# Altium PCB pcb.PcbDoc
Units mm, origin at the board's own origin, x right, y up, seen from the top; angles counter-clockwise.
Board outline 60 x 40 mm, 2 copper layers (Top Layer, Bottom Layer); 12 components, 13 nets, 57 pads, 0 vias.
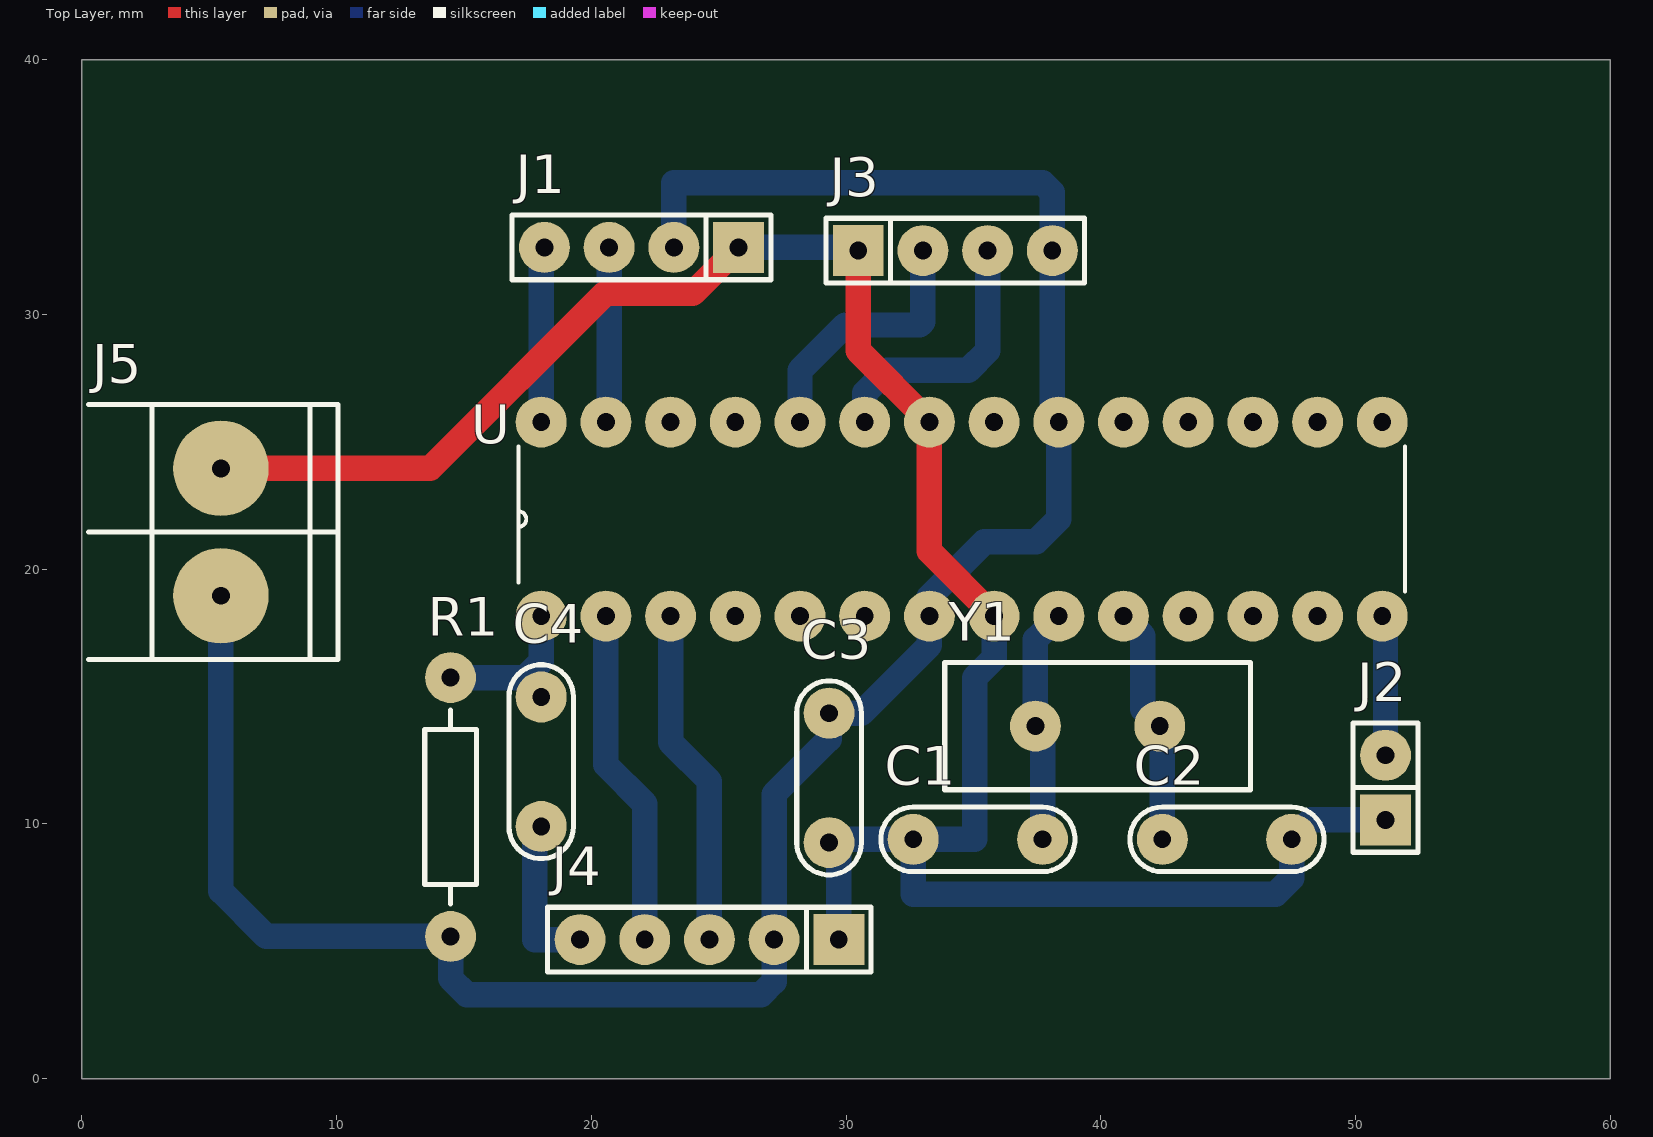
[diagram p0: Top Layer view]
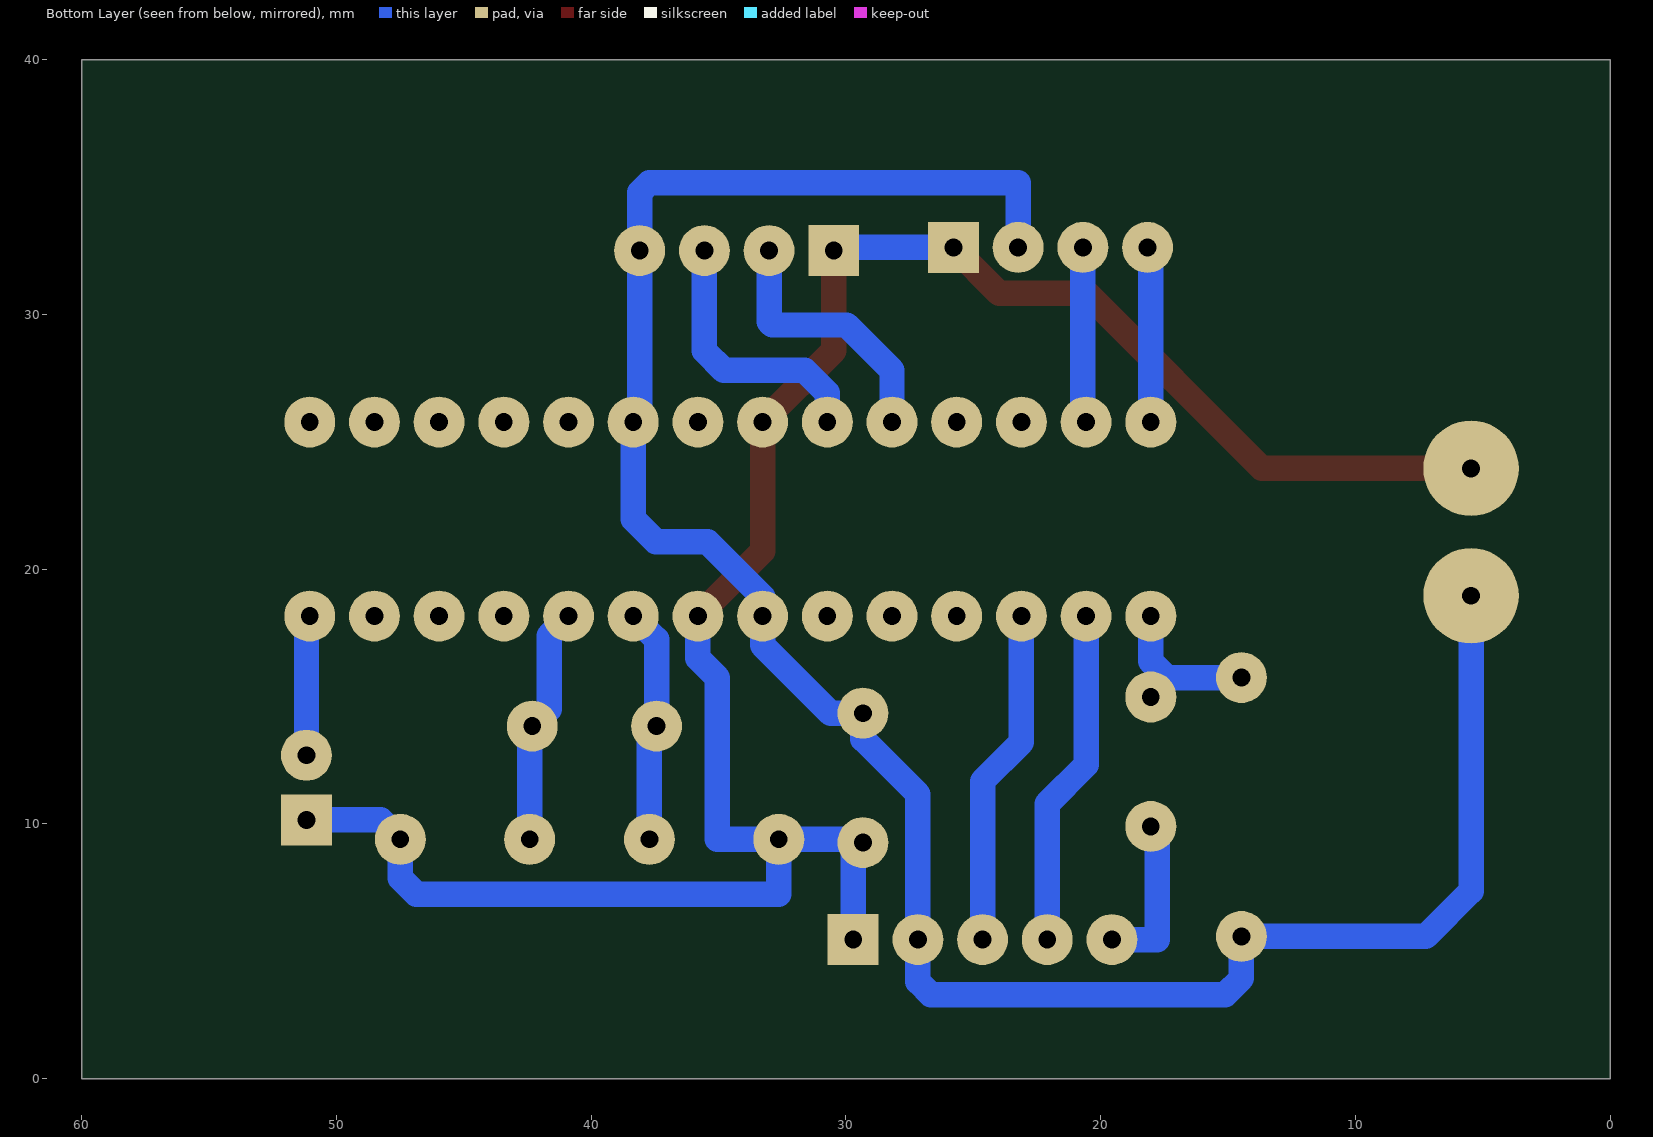
[diagram p1: Bottom Layer view, seen from below]

## Layer stack, top to bottom
Top Solder: solder mask 0.0102, Solder Resist, Dk 3.5
Top Layer: signal copper 0.0356
Dielectric 1: dielectric 0.32, FR-4, Dk 4.8
Bottom Layer: signal copper 0.0356
Bottom Solder: solder mask 0.0102, Solder Resist, Dk 3.5

## Board outline
0,0 60,0 60,40 0,40

## Design rules (kind name [scope] priority, off if disabled: settings)
Clearance [All] p1: gap=0.3 ignorepadtopadclearanceinfootprint=FALSE
PolygonConnect [All] p1: connectstyle=Relief reliefconductorwidth=0.254 reliefentries=4 polygonreliefangle="90 Angle" airgapwidth=0.254
RoutingVias [All] p1: holewidth=0.711 width=1.27 viastyle="Through Hole" minholewidth=0.711 minwidth=1.27 maxholewidth=0.711 maxwidth=1.27
SolderMaskExpansion [All] p1: expansion=0.102
Width [All] p1: maxlimit=1 minlimit=1 preferedwidth=1
30 further rules are at their usual default settings.

## Components (designator, comment, footprint, x,y, rotation, side; value= is the part's Value field where it differs from the comment)
C1 "22p" CAP200 35.179,9.398 r180 top
C2 "22p" CAP200 44.958,9.398 r0 top
C3 "100n" CAP200 29.337,11.811 r270 top
C4 "CAP" CAP200 18.034,12.446 r270 top
J1 "Pantalla" SIP4 21.971,32.639 r180 top
J2 "BotonTara" SIP2 51.181,11.43 r90 top
J3 "CON4" SIP4 34.29,32.512 r0 top
J4 "Prog" SIP5 29.718,5.461 r180 top
J5 "Alimentacion" BORNERA2 5.461,21.463 r180 top
R1 "10k" RES400 14.478,15.748 r270 top
U "ATMEGA328P-PU" DIP254P762X457-28 51.054,25.781 r90 top
Y1 "16Mhz" "CRISTAL PERFIL" 39.878,13.843 r0 top

## Footprints (in the part's own frame and the unit in brackets; to place one, negate y for a bottom-side part, rotate by r counter-clockwise, add the part's x,y. Pads: shape width x height; smd on the part's side, far side on the other; paste and mask are expansions set on the pad)
BORNERA2 [mm] "Bornera con Tornillos 5mm separación"
  round 3.75 hole 0.7: 1(0,2.5) 2(0,-2.5)
  silkscreen extent -4.6,-5 5.2,5, body extent -3.76,-4.89 3.94,5.61, height 10
CAP200 [mm]
  round 2 hole 0.7: 1(-2.54,0) 2(2.54,0)
  silkscreen extent -3.81,-1.27 3.81,1.27, body extent -2.79,-1.17 2.79,1.12, height 6.24
"CRISTAL PERFIL" [mm]
  round 2 hole 0.7: 1(-2.44,0) 2(2.44,0)
  silkscreen extent -6,-2.5 6,2.5, body extent -5.68,-2.32 5.68,2.33, height 3.5
DIP254P762X457-28 [mm]
  round 2 hole 0.7: 1(-7.62,33.02) 2(-7.62,30.48) 3(-7.62,27.94) 4(-7.62,25.4) 5(-7.62,22.86) 6(-7.62,20.32) 7(-7.62,17.78) 8(-7.62,15.24) 9(-7.62,12.7) 10(-7.62,10.16) 11(-7.62,7.62) 12(-7.62,5.08) 13(-7.62,2.54) 14(-7.62,0) 15(0,0) 16(0,2.54) 17(0,5.08) 18(0,7.62) 19(0,10.16) 20(0,12.7) 21(0,15.24) 22(0,17.78) 23(0,20.32) 24(0,22.86) 25(0,25.4) 26(0,27.94) 27(0,30.48) 28(0,33.02)
  silkscreen extent -6.65,-0.89 -0.97,33.91
RES400 [mm]
  round 2 hole 0.7: 1(0,0) 2(10.16,0)
  silkscreen extent 1.27,-1.02 8.89,1.02, body extent -0.3,-1.14 10.46,1.17, height 2.43
SIP2 [mm]
  rect 2x2 hole 0.7: 1(-1.27,0)
  round 2 hole 0.7: 2(1.27,0)
  silkscreen extent -2.54,-1.27 2.54,1.27
SIP4 [mm]
  rect 2x2 hole 0.7: 1(-3.81,0)
  round 2 hole 0.7: 2(-1.27,0) 3(1.27,0) 4(3.81,0)
  silkscreen extent -5.08,-1.27 5.08,1.27, body extent -5.08,-1.27 5.08,1.27, height 8.38
SIP5 [mm]
  rect 2x2 hole 0.7: 1(0,0)
  round 2 hole 0.7: 2(2.54,0) 3(5.08,0) 4(7.62,0) 5(10.16,0)
  silkscreen extent -1.27,-1.27 11.43,1.27, body extent -1.27,-1.27 11.43,1.27, height 8.38

## Part data
C1 C2 C3: library part CAP
J1: library part CON4
J2: library part CON2
J4: library part CON5
J5: library part "BORNERA 2"
R1: library part RES
U: "AVR AVR® ATmega Microcontroller IC 8-Bit 20MHz 32KB _16K x 16_ FLASH 28-PDIP", Package="PDIP-28 Microchip", Availability=Unavailable, MF=Microchip, MP=ATMEGA328P-PU, Price=None, SnapEDA_Link=https://www.snapeda.com/parts/ATMEGA328P-PU/Microchip/view-part/649476/?ref=snap
Y1: library part CRISTAL

## Nets (pads, with @x,y where several pads share a name; then routed paths per layer and width w, separated by ;. In a path a pad name is that pad's centre, name@x,y a point inside that pad or via, vN(x,y) a via of type N, cw(c..) or ccw(c..) an arc to the next point about the centre after c; other vN are vias at no path point)
+5: C3.1 J1.2 J3.4 J4.2 J5.1 R1.2 U.7 U.20 | length 91.4
  Bottom Layer w1: J5.1 5.461,7.366 7.239,5.588 R1.2 14.478,3.937 15.113,3.302 26.67,3.302 27.178,3.81 J4.2 27.178,11.176 29.337,13.335 C3.1 30.607,14.351 33.274,17.018 U.7 33.274,18.923 35.433,21.082 37.465,21.082 38.354,21.971 U.20 38.1,26.035 J3.4 38.1,34.798 37.719,35.179 23.241,35.179 J1.2
a0: J3.3 U.23 | length 10.6
  Bottom Layer w1: U.23 30.734,26.924 31.623,27.813 34.798,27.813 35.56,28.575 J3.3
a1: J3.2 U.24 | length 10.4
  Bottom Layer w1: U.24 28.194,27.813 29.972,29.591 32.893,29.591 33.02,29.718 J3.2
d8: J2.2 U.14 | length 5.5
  Bottom Layer w1: U.14 51.181,18.034 J2.2
GND: C1.2 C2.2 C3.2 J1.1 J2.1 J3.1 J4.1 J5.2 U.8 U.22 | length 86.8
  Top Layer w1: J5.2 13.67,23.963 20.546,30.839 23.987,30.839 25.781,32.633 J1.1 ; J3.1 30.48,28.581 33.274,25.787 U.22 33.274,20.707 35.814,18.167 U.8
  Bottom Layer w1: J1.1 30.353,32.639 J3.1 ; J4.1 29.718,8.89 C3.2 29.464,9.398 C1.2 ; U.8 35.814,16.51 35.052,15.748 35.052,9.398 C1.2 ; J2.1 48.26,10.16 C2.2 47.498,7.874 46.863,7.239 32.639,7.239 C1.2
NetC1_1: C1.1 U.9 Y1.1 | length 9.3
  Bottom Layer w1: C1.1 37.719,13.562 Y1.1 37.438,17.245 U.9
NetC2_1: C2.1 U.10 Y1.2 | length 9.4
  Bottom Layer w1: U.10 41.656,17.399 41.656,14.505 Y1.2 42.418,13.743 C2.1
NetC4_1: C4.1 R1.1 U.1 | length 5.6
  Bottom Layer w1: R1.1 17.399,15.748 18.034,16.383 U.1
reset: C4.2 J4.5 | length 6.3
  Bottom Layer w1: C4.2 17.78,9.652 17.78,5.461 J4.5
rx: J4.4 U.2 | length 13.3
  Bottom Layer w1: U.2 20.574,12.319 22.098,10.795 J4.4
scl: J1.4 U.28 | length 6.9
  Bottom Layer w1: U.28 18.034,32.512 J1.4
sda: J1.3 U.27 | length 6.9
  Bottom Layer w1: U.27 20.701,25.908 J1.3
tx: J4.3 U.3 | length 13.3
  Bottom Layer w1: U.3 23.114,13.208 24.638,11.684 J4.3
pads on no net: U.4 U.5 U.6 U.11 U.12 U.13 U.15 U.16 U.17 U.18 U.19 U.21 U.25 U.26